# EAGLE board ReturnSlice (EAGLE 7.5.0)
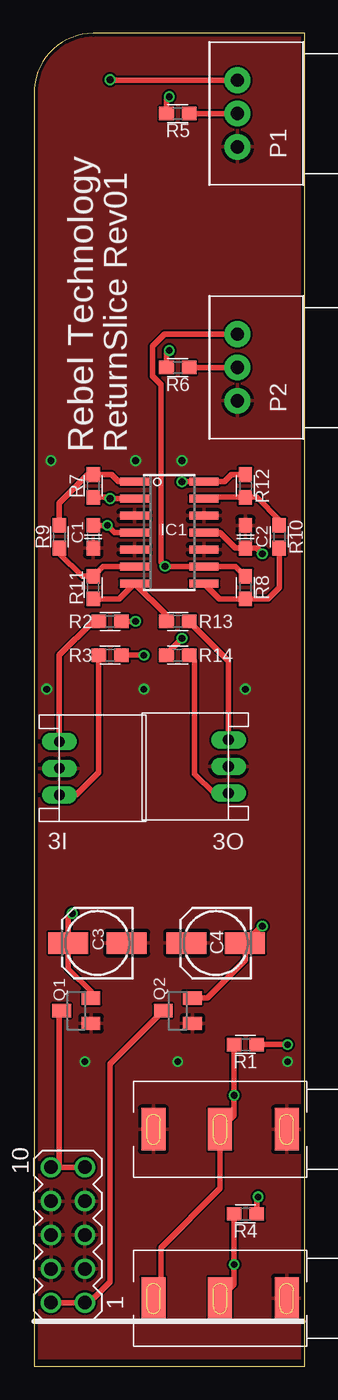
[diagram p0: board, top side]
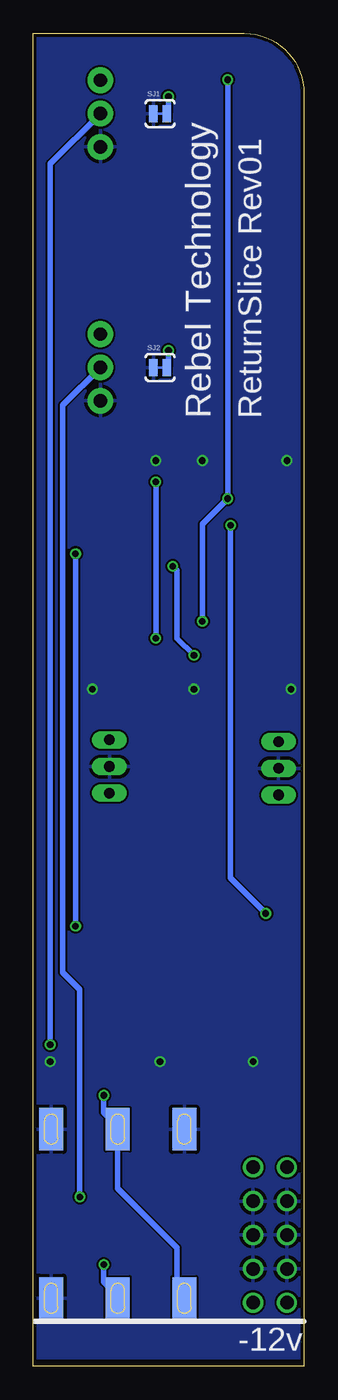
[diagram p1: board, bottom side, seen from below]

Size 20.32 x 100 mm. Coordinates in mm from the lower left corner, seen from the top.
Outline: 20.32,0 20.32,100 4.45,100 arc90 0,95.49 0,0 20.32,0
Copper layers (1*16): Top 0.035mm / dielectric 1.5mm / Bottom 0.035mm
Design rules "SeeedStudio_2layer_DRU_no_angle_20140221": minimum track width 6mil, minimum drill 12mil, track to track 6mil, track to pad 6mil, pad to pad 6mil, via to via 6mil, smd to smd 0mil, copper to edge 10mil, drill to drill 10mil, minimum pad ring 10mil, minimum via ring 6mil, stop-mask expansion 2mil, vias tented up to drill 100mil, thermal gap 10mil

## Footprints (pad centres in the part's own frame; a part is rotated, then mirrored left to right if it is on the bottom)
CON-JST_PH_3W = drill 0.8 long: P1 0,0; P2 -2,0; P3 -4,0
C0603 = smd 1.1 x 1: 1 -0.85,0; 2 0.85,0
153CLV-0505 = smd 3 x 1.6: + 2.2,0; - -2.2,0
SO14 = smd 0.6 x 2.2: 1 -3.81,-2.6; 2 -2.54,-2.6; 3 -1.27,-2.6; 4 0,-2.6; 5 1.27,-2.6; 6 2.54,-2.6; 7 3.81,-2.6; 8 3.81,2.6; 9 2.54,2.6; 10 1.27,2.6; 11 0,2.6; 12 -1.27,2.6; 13 -2.54,2.6; 14 -3.81,2.6
UJ-3502-R-SLOT = smd 3.2 x 1.8: P$1 0,0; P$2 0,5; P$3 0,-5 | smd 3.2 x 1.8 bottom: P$1B 0,0; P$2B 0,5; P$3B 0,-5
POT-BOURNS-PTD901 = drill 1 pad 1.93: 1 -2.5,-0.036; 2 0,-0.036; 3 2.5,-0.036
SOT23 = smd 1 x 1.4: 1 -0.95,-1.1; 2 0.95,-1.1; 3 0,1.1
0603 = smd 1.1 x 1: 1 -0.85,0; 2 0.85,0
SJ_2S-TRACE = smd 0.635 x 1.27: 1 -0.508,0; 2 0.508,0
MA05-2 = drill 1.016: 1 -5.08,-1.27; 2 -5.08,1.27; 3 -2.54,-1.27; 4 -2.54,1.27; 5 0,-1.27; 6 0,1.27; 7 2.54,-1.27; 8 2.54,1.27; 9 5.08,-1.27; 10 5.08,1.27

## Placement (x,y rotation side)
3I  CON-JST_PH_3W  [CON-JST_PH_3W]  1.9,42.86 270 top
3O  CON-JST_PH_3W  [CON-JST_PH_3W]  14.6,46.99 90 top
C1  100n  [C0603]  4.45,62.23 270 top
C2  100n  [C0603]  15.88,62.23 90 top
C3  10u  [153CLV-0505]  4.76,31.75 180 top
C4  10u  [153CLV-0505]  13.65,31.75 180 top
IC1  QUAD_OPAMPD  [SO14]  10.16,62.55 270 top
J1  JACK-UJ-3502-RSLOT  [UJ-3502-R-SLOT]  13.97,17.78 90 top
J2  JACK-UJ-3502-RSLOT  [UJ-3502-R-SLOT]  13.97,5.08 90 top
P1  10k  [POT-BOURNS-PTD901]  15.24,93.98 90 top
P2  10k  [POT-BOURNS-PTD901]  15.24,74.93 90 top
Q1  SI2309CDS  [SOT23]  3.18,26.67 90 top
Q2  BSS123  [SOT23]  10.79,26.67 90 top
R1  100k  [0603]  15.88,24.13 180 top
R2  100k  [0603]  5.72,55.88 180 top
R3  100k  [0603]  5.72,53.34 180 top
R4  100k  [0603]  15.88,11.43 180 top
R5  2k7  [0603]  10.79,93.98 180 top
R6  2k7  [0603]  10.79,74.93 180 top
R7  100k  [0603]  4.45,66.04 270 top
R8  100k  [0603]  15.88,58.42 90 top
R9  10k  [0603]  1.9,62.23 90 top
R10  10k  [0603]  18.41,62.23 270 top
R11  10k  [0603]  4.45,58.42 90 top
R12  10k  [0603]  15.88,66.04 270 top
R13  1k  [0603]  10.79,55.88 0 top
R14  1k  [0603]  10.79,53.34 0 top
SJ1  SOLDERJUMPERTRACE  [SJ_2S-TRACE]  10.79,93.98 0 bottom
SJ2  SOLDERJUMPERTRACE  [SJ_2S-TRACE]  10.79,74.93 0 bottom
SV1  [MA05-2]  2.54,9.84 90 top

## Library data of the parts
3I 3O C1 C2 J1 J2 P1 P2 R1-R14 = Rebel
C3 C4 = rcl
IC1 = adafruit
Q1 Q2 = transistor-small-signal
SJ1 SJ2 = SparkFun
SV1 = con-lstb; OC_FARNELL: unknown; OC_NEWARK: unknown

## Nets
+12V: C1.1 C3.+ IC1.4 Q1.2
-12V: C2.1 C4.- IC1.11 Q2.2
GND: 3I.P2 3O.P2 C1.2 C2.2 C3.- C4.+ IC1.3 IC1.5 IC1.10 IC1.12 J1.P$2 J1.P$2B J1.P$3 J1.P$3B J2.P$3 J2.P$3B P1.1 P2.1 Q1.1 Q2.1 SJ1.1 SJ2.1 SV1.3 SV1.4 SV1.5 SV1.6 SV1.7 SV1.8
IN_A: 3I.P3 R2.2
IN_L: J1.P$1 J1.P$1B J2.P$2 J2.P$2B R1.2
IN_R: J2.P$1 J2.P$1B R4.2
N$1: Q2.3 SV1.1 SV1.2
N$3: R5.2 SJ1.2
N$4: R6.2 SJ2.2
N$5: IC1.9 P2.3 R3.1 R8.2
N$7: IC1.6 R9.1 R11.2
N$8: 3O.P1 R13.2
N$9: 3O.P3 R14.2
N$10: IC1.7 R11.1 R13.1
N$11: P2.2 R4.1 R6.1
N$13: P1.2 R1.1 R5.1
N$14: Q1.3 SV1.9 SV1.10
N$15: 3I.P1 R3.2
N$16: IC1.2 P1.3 R2.1 R7.2
N$20: IC1.13 R10.1 R12.2
N$25: IC1.14 R12.1 R14.1
N$45: IC1.8 R8.1 R10.2
N$50: IC1.1 R7.1 R9.2

## Tracks (layer width: path | path; a pad name or v marks a point on that pad's centre or on a via)
+12V  (via drill 0.5)
  Top 0.406: IC1.4 6.03,62.55 v5.5,63.08 C1.1 | Q1.2 4.28,28.11 2.56,29.82 C3.+ 2.56,33.68 v2.86,33.97
  Bottom 0.406: v5.5,63.08 5.5,36.62 v2.86,33.97
-12V  (via drill 0.5)
  Top 0.406: IC1.11 13.97,62.55 15.14,61.38 C2.1 16.73,61.38 v17.15,60.96 | Q2.2 13.01,27.62 15.88,30.48 15.88,31.73 C4.- 17.12,33.02 v17.15,33.02
  Bottom 0.406: v17.15,60.96 v17.15,33.02
GND  (via drill 0.5)
  other vias: 8.26,50.8 0.95,50.8 15.88,50.8 7.62,67.94 1.27,67.94 11.11,67.94 10.79,22.86 3.81,22.86 19.05,22.86
  pour Bottom: -17.14,0.64 27.3,0.64 27.3,100.97 -17.14,100.97
  pour Top: -15.88,0.64 28.57,0.64 28.57,100.97 -15.88,100.97
IN_A
  Top 0.406: R2.2 4.45,55.88 1.9,53.34 3I.P3
IN_L  (via drill 0.5)
  Top 0.406: R1.2 v15.03,20.32 15.03,18.84 J1.P$1B 13.97,13.34 9.53,8.89 9.53,6.35 8.97,5.79 J2.P$2B
  Bottom 0.406: J2.P$2B 9.53,5.63 9.53,8.89 13.97,13.34 J1.P$1B 13.97,18 15.03,19.05 v15.03,20.32
IN_R  (via drill 0.5)
  Top 0.406: R4.2 v15.03,7.62 15.03,6.13 J2.P$1B
  Bottom 0.406: J2.P$1B 13.97,5.29 15.03,6.35 v15.03,7.62
N$1
  Top 0.406: SV1.2 SV1.1 4.13,4.76 5.72,6.35 5.72,22.69 Q2.3 9.53,26.5
N$3  (via drill 0.5)
  Top 0.406: R5.2 9.94,95.03 v10.16,95.25
  Bottom 0.406: v10.16,95.25 10.16,94.11 SJ1.2
N$4  (via drill 0.5)
  Top 0.406: R6.2 9.94,75.98 v10.16,76.2
  Bottom 0.406: v10.16,76.2 10.16,75.06 SJ2.2
N$5  (via drill 0.5)
  Top 0.406: R8.2 15.14,60.01 IC1.9 v9.84,60.01 9.53,60.33 9.53,73.66 8.89,74.3 8.89,76.52 9.8,77.43 P2.3 | v8.26,53.34 R3.1
  Bottom 0.406: v8.26,53.34 9.53,54.61 9.53,59.69 v9.84,60.01
N$7
  Top 0.406: R9.1 1.9,60.96 3.6,59.27 R11.2 5.18,60.01 IC1.6
N$8
  Top 0.406: 3O.P1 14.6,52.92 R13.2
N$9
  Top 0.406: 3O.P3 13.53,42.99 12.06,44.45 12.06,52.92 R14.2
N$10
  Top 0.406: R11.1 6.39,57.57 IC1.7 9.94,56.35 R13.1
N$11  (via drill 0.5)
  Top 0.406: R4.1 16.73,12.6 v16.83,12.7 | R6.1 P2.2
  Bottom 0.406: v16.83,12.7 16.83,28.26 18.1,29.53 18.1,72.11 P2.2
N$13  (via drill 0.5)
  Top 0.406: R1.1 v19.05,24.13 | R5.1 P1.2
  Bottom 0.406: v19.05,24.13 19.05,90.21 P1.2
N$14
  Top 0.406: Q1.3 1.9,26.5 1.9,14.92 | SV1.9 1.9,14.92 | 1.9,14.92 SV1.10
N$15
  Top 0.406: R3.2 4.87,44.55 3.18,42.86 3I.P1
N$16  (via drill 0.5)
  Top 0.406: IC1.2 v5.72,65.09 5.61,65.19 R7.2 | P1.3 5.76,96.48 v5.72,96.52 | v7.62,55.88 R2.1
  Bottom 0.406: v7.62,55.88 7.62,63.18 v5.72,65.09 v5.72,96.52
N$20
  Top 0.406: IC1.13 12.86,65.19 R12.2 16.73,65.19 18.41,63.5 R10.1
N$25  (via drill 0.5)
  Top 0.406: R12.1 14.82,66.89 14.29,66.36 IC1.14 v11.11,66.36 | R14.1 9.94,53.44 v11.11,54.61
  Bottom 0.406: v11.11,54.61 v11.11,66.36
N$45
  Top 0.406: IC1.8 13.93,57.57 R8.1 17.56,57.57 18.41,58.42 R10.2
N$50
  Top 0.406: IC1.1 6.35,66.36 5.82,66.89 R7.1 4.03,66.89 1.9,64.77 R9.2

## Text on the board
tPlace: Rebel Technology | ReturnSlice Rev01
bPlace: ReturnSlice Rev01 | Rebel Technology | -12v